# EAGLE board BPv3-PIC-prog-v1c (EAGLE 5.07)
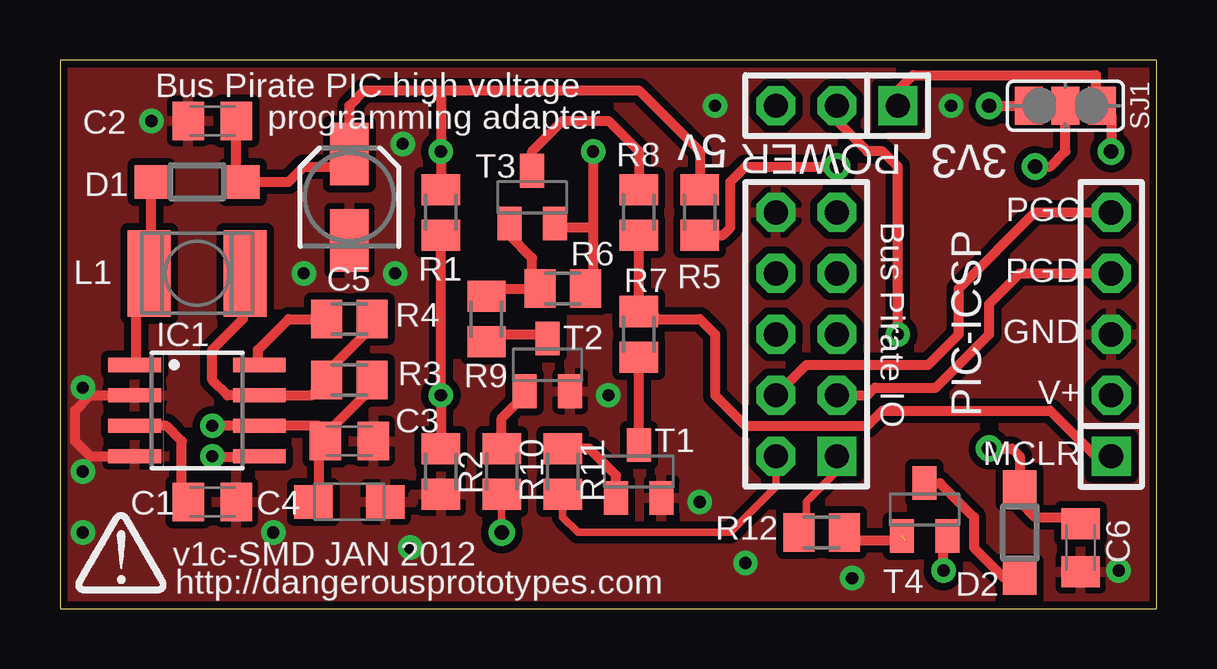
[diagram p0: board, top side]
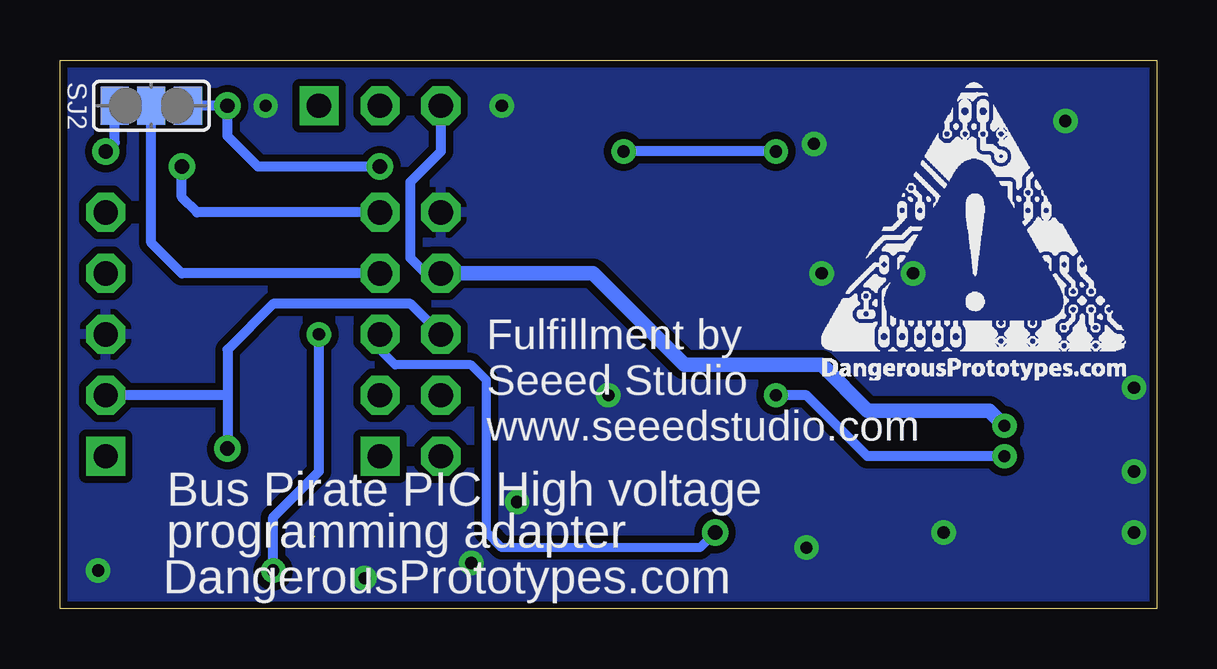
[diagram p1: board, bottom side, seen from below]

Size 45.72 x 22.86 mm. Coordinates in mm from the lower left corner, seen from the top.
Outline: 0,0 45.72,0 45.72,22.86 0,22.86 0,0
Copper layers (1*16): Top 0.035mm / dielectric 1.5mm / Bottom 0.035mm
Design rules "SparkFun": minimum track width 8mil, minimum drill 20mil, track to track 8mil, track to pad 8mil, pad to pad 8mil, via to via 8mil, smd to smd 8mil, copper to edge 10mil, drill to drill 8mil, minimum pad ring 12mil, minimum via ring 10mil, stop-mask expansion 4mil, vias tented up to drill 25mil, thermal gap 10mil

## Footprints (pad centres in the part's own frame; a part is rotated, then mirrored left to right if it is on the bottom)
C0805K = smd 1.3 x 1.6: 1 -1,0; 2 1,0
SMC_A = smd 1.6 x 1.4: + -1.5,0; - 1.5,0
SANYO-OSCON_SMD_A5 = smd 2.6 x 1.6: + 1.8,0; - -1.8,0
SOD123 = smd 1.4 x 1.4: A 1.9,0; C -1.9,0
SO08 = smd 0.6 x 2.2: 1 -1.905,-2.6; 2 -0.635,-2.6; 3 0.635,-2.6; 4 1.905,-2.6; 5 1.905,2.6; 6 0.635,2.6; 7 -0.635,2.6; 8 -1.905,2.6
2X05 = drill 1.016 square: 1 -5.08,-1.27 | drill 1.016 octagon: 2 -5.08,1.27; 3 -2.54,-1.27; 4 -2.54,1.27; 5 0,-1.27; 6 0,1.27; 7 2.54,-1.27; 8 2.54,1.27; 9 5.08,-1.27; 10 5.08,1.27
L4532P = smd 1.8 x 3.6: 1 -2,0; 2 2,0
1X05 = drill 1.016 square: 1 -5.08,0 | drill 1.016 octagon: 2 -2.54,0; 3 0,0; 4 2.54,0; 5 5.08,0
1X03 = drill 1.016 square: 1 -2.54,0 | drill 1.016 octagon: 2 0,0; 3 2.54,0
M0805 = smd 1.3 x 1.6: 1 -0.95,0; 2 0.95,0
SJ_2 = smd 1.168 x 1.6: 1 -1.524,0; 2 0,0; 3 1.524,0
SOT23-BEC = smd 1 x 1.4: B -0.95,-1.1; C 0,1.1; E 0.95,-1.1

## Placement (x,y rotation side)
C1  470pF  [C0805K]  6.35,4.45 0 top
C2  0.1uF/50V  [C0805K]  6.35,20.32 180 top
C3  0.1uF  [C0805K]  12.06,6.98 0 top
C4  10uF  [SMC_A]  12.06,4.45 0 top
C5  4.7uF/35V  [SANYO-OSCON_SMD_A5]  12.06,17.15 90 top
C6  0.1uF/50V  [C0805K]  42.55,2.54 270 top
D1  1N5819, 20V, 1A+  [SOD123]  5.72,17.78 180 top
D2  1N5819, 20V, 1A+  [SOD123]  40,3.18 270 top
IC1  MC34063AD  [SO08]  5.72,8.26 270 top
JP1  FEMALE!!  [2X05]  31.12,11.43 90 top
L1  680uH/0.12A  [L4532P]  5.72,13.97 0 top
PIC-ICSP  [1X05]  43.81,11.43 90 top
POWER  [1X03]  32.39,20.95 180 top
R1  20K  [M0805]  15.88,16.51 270 top
R2  2K2  [M0805]  15.88,5.71 270 top
R3  4R7  [M0805]  12.06,9.53 180 top
R4  180R  [M0805]  12.06,12.06 0 top
R5  39K  [M0805]  26.67,16.51 90 top
R6  100K  [M0805]  20.95,13.33 0 top
R7  100R  [M0805]  24.13,11.43 90 top
R8  10K  [M0805]  24.13,16.51 90 top
R9  10K  [M0805]  17.78,12.06 90 top
R10  10K  [M0805]  18.41,5.71 90 top
R11  10K  [M0805]  20.95,5.71 90 top
R12  10K  [M0805]  31.75,3.18 0 top
SJ1  [SJ_2]  41.91,20.95 0 top
SJ2  [SJ_2]  41.91,20.95 180 bottom
T1  NPN, 200mA+, 30+hfe  [SOT23-BEC]  24.13,5.71 0 top
T2  NPN, 200mA+, 30+hfe  [SOT23-BEC]  20.32,10.16 0 top
T3  PNP, 200mA+, 30hfe  [SOT23-BEC]  19.69,17.15 0 top
T4  PNP, 1A+, 40+ hef  [SOT23-BEC]  36.04,4.13 0 top
U$1  [DP-LOGO]  0.63,0.63 0 top
U$3  [DP_LOGO_ART_0.5X0.5]  13.97,9.53 0 bottom

## Library data of the parts
C1-C6 L1 R1-R12 = rcl
D1 D2 = diode
IC1 = v-reg-3
JP1 PIC-ICSP POWER = pinhead-2
SJ1 SJ2 = jumper
T1-T4 U$3 = dp_devices
U$1 = DP-logo

## Nets
3V3: POWER.1 SJ1.3 SJ2.3
3V3(V3)ADC(V2GO): JP1.9 SJ1.2
5V: C3.1 C4.+ IC1.6 JP1.8 POWER.3 R3.1
13V: C2.1 C5.+ D1.C R1.1 R5.2 R6.2 T3.E
ADC: R5.1 SJ1.1 SJ2.1
ADC(V3)3V3(V2GO): JP1.7 SJ2.2
GND: C1.2 C2.2 C3.2 C4.- C5.- C6.2 IC1.2 IC1.4 JP1.10 PIC-ICSP.3 R2.2 T1.E T2.E
MCLR: JP1.2 R11.1
MISO: JP1.1 R12.1
N$1: R12.2 T4.B
N$3: R7.1 T1.C
N$4: R8.2 T3.C
N$5: R9.1 T2.C
N$6: R6.1 R9.2 T3.B
N$7: R11.2 T1.B
N$8: R10.2 T2.B
N$9: IC1.8 R4.1
N$10: D2.A T4.C
N$11: IC1.7 L1.2 R3.2 R4.2
N$14: IC1.5 R1.2 R2.1
N$17: D1.A IC1.1 L1.1
N$19: C1.1 IC1.3
PGC: JP1.4 PIC-ICSP.5
PGD: JP1.3 PIC-ICSP.4
VDD_SWITCH: POWER.2 T4.E
VPP: PIC-ICSP.1 R7.2 R8.1
VPPEN: JP1.5 R10.1
VTARGET: C6.1 D2.C JP1.6 PIC-ICSP.2

## Tracks (layer width: path | path; a pad name or v marks a point on that pad's centre or on a via)
3V3  (via drill 0.6)
  Top 0.406: POWER.1 34.92,21.59 35.56,22.23 43.18,22.23 43.18,21.21 SJ2.3 43.81,20.57 v43.81,19.05
  Bottom 0.406: SJ2.3 43.43,19.43 v43.81,19.05
3V3(V3)ADC(V2GO)  (via drill 0.6)
  Top 0.305: SJ1.2 43.18,20.95
  Top 0.406: v40.64,18.41 41.28,18.41 41.91,19.05 SJ1.2
  Bottom 0.406: JP1.9 40,16.51 40.64,17.15 v40.64,18.41
5V  (via drill 0.51)
  Top 0.406: 10.8,6.98 C3.1 11.43,7.35 11.43,7.62 12.7,8.89 12.7,9.21 R3.1 13.34,9.21 | v6.35,7.62 IC1.6 10.8,7.62 10.8,6.98 | 10.8,6.98 10.8,4.68 C4.+ 10.74,4.45 10.69,4.39
  Bottom 0.406: POWER.3 29.84,19.05 31.12,17.78 31.12,14.6 30.48,13.97 JP1.8
  Bottom 0.61: JP1.8 23.49,13.97 19.69,10.16 13.97,10.16 12.06,8.26 6.98,8.26 v6.35,7.62
13V  (via drill 0.51)
  Top 0.406: C2.1 7.35,18.05 D1.C 9.52,17.78 10.16,18.41 12.06,18.41 C5.+ | C5.+ 12.22,19.1 | R1.1 v15.88,19.05 15.88,21.59 | R5.2 26.67,19.05 24.13,21.59 15.88,21.59 | 15.88,21.59 12.7,21.59 12.06,20.95 C5.+ | R6.2 22.23,13.33 22.23,15.87 | T3.E 20.78,16.05 20.95,15.87 22.23,15.87 | v22.23,19.05 22.23,15.87
  Bottom 0.406: v15.88,19.05 v22.23,19.05
ADC  (via drill 0.6)
  Top 0.406: R5.1 27.62,15.56 27.94,15.87 27.94,17.78 28.58,18.41 v32.39,18.41 | 40.64,20.7 SJ2.1 v38.73,20.95
  Bottom 0.406: SJ2.1 v38.73,20.95 38.73,19.69 37.47,18.41 v32.39,18.41
ADC(V3)3V3(V2GO)
  Bottom 0.305: SJ2.2 40,20.95
  Bottom 0.406: JP1.7 40.64,13.97 41.91,15.24 SJ2.2
GND  (via drill 0.51)
  Top 0.406: IC1.2 1.27,8.89 0.63,8.26 0.63,6.98 1.27,6.35 IC1.4
  other vias: 26.67,4.45 22.86,8.89 10.16,13.97 13.97,13.97 0.95,3.18 14.6,2.54 8.89,3.18 0.95,9.21 0.95,5.71 37.15,20.95 27.3,20.95 28.58,1.91 44.13,1.59 3.81,20.32 14.29,19.37 33.02,1.27
  pour Bottom (isolate 0.305): 0,22.86 0,0 45.72,0 45.72,22.86
  pour Top (isolate 0.305): 0,22.86 45.72,22.86 45.72,0 0,0
MCLR
  Top 0.305: JP1.2 29.84,5.08 27.94,3.18 21.59,3.18 20.95,3.81 R11.1
MISO
  Top 0.305: JP1.1 32.39,5.71 31.12,4.45 31.12,3.49 R12.1
N$1  (1 unrouted)
  Top 0.406: 35.25,2.85 35.24,2.86 33.02,2.86 R12.2
N$3
  Top 0.406: T1.C R7.1
N$4
  Top 0.406: R8.2 24.13,19.05 22.86,20.32 20.95,20.32 19.69,19.05 T3.C
N$5
  Top 0.406: T2.C 20.32,11.43 18.09,11.43 R9.1
N$6
  Top 0.406: 18.41,16.51 18.73,16.19 T3.B 18.73,15.56 19.69,14.6 19.69,13.65 R6.1 18.1,13.33 R9.2
N$7
  Top 0.406: R11.2 22.07,6.66 23.18,5.56 T1.B
N$8
  Top 0.406: R10.2 18.41,7.94 19.37,8.89 T2.B
N$9
  Top 0.406: R4.1 9.52,12.06 8.26,10.79 8.26,10.22 IC1.8
N$10
  Top 0.406: T4.C 36.68,5.23 38.1,3.81 38.1,2.54 39.37,1.27 D2.A
N$11
  Top 0.406: R4.2 12.7,11.75 12.7,11.43 11.12,9.85 R3.2 10.48,8.89 IC1.7 6.98,8.89 6.35,9.53 6.35,10.79 7.62,12.06 7.62,13.97 L1.2
N$14  (via drill 0.51)
  Top 0.406: IC1.5 8.29,6.32 6.33,6.32 v6.35,6.35 | R2.1 v15.88,8.89 R1.2
  Bottom 0.406: v6.35,6.35 12.06,6.35 14.6,8.89 v15.88,8.89
N$17
  Top 0.406: 3.72,17.68 D1.A 3.81,13.97 L1.1 3.12,13.37 3.17,13.31 3.17,10.16 IC1.1
N$19
  Top 0.406: IC1.3 4.45,7.62 5.08,6.98 5.08,4.08 C1.1
PGC
  Top 0.406: JP1.4 31.12,10.16 36.19,10.16 37.47,11.43 37.47,13.33 40.64,16.51 PIC-ICSP.5
PGD
  Top 0.406: PIC-ICSP.4 40,13.97 38.73,12.7 38.73,11.43 36.51,9.21 33.97,9.21 33.66,8.89 JP1.3
VDD_SWITCH  (via drill 0.51)
  Top 0.406: POWER.2 32.39,20.32 33.66,19.05 34.29,19.05 34.92,18.41 v34.92,11.43 | 36.99,1.74 v36.83,1.59 36.83,3.03 T4.E
  Bottom 0.406: v34.92,11.43 34.92,5.71 36.83,3.81 v36.83,1.59
VPP
  Top 0.305: R7.2 24.77,12.06
  Top 0.406: R8.1 R7.2 24.8,12.19 | PIC-ICSP.1 43.18,6.35 41.28,8.26 34.29,8.26 33.66,7.62 28.58,7.62 27.3,8.89 27.3,11.43 26.67,12.06 24.77,12.06
VPPEN  (via drill 0.6)
  Top 0.305: R10.1 v18.41,3.18
  Bottom 0.381: v18.41,3.18 19.05,2.54 27.3,2.54 27.94,3.18 27.94,9.53 28.58,10.16 31.75,10.16 32.39,10.79 JP1.5
VTARGET  (via drill 0.6)
  Top 0.406: C6.1 42.28,3.81 40.64,3.81 40,4.45 D2.C 40,6.35 39.69,6.67 v38.73,6.67
  Bottom 0.406: JP1.6 31.12,12.7 36.83,12.7 38.73,10.79 38.73,8.89 | 38.73,8.89 PIC-ICSP.2 | 38.73,8.89 v38.73,6.67

## Text on the board
tPlace: Bus Pirate PIC high voltage | programming adapter | PGC | Bus Pirate IO | PGD | GND | V+ | MCLR | v1c-SMD JAN 2012 | http://dangerousprototypes.com
tNames: 5v | 3v3
bNames: Fulfillment by | Seeed Studio | www.seeedstudio.com | Bus Pirate PIC High voltage | programming adapter | DangerousPrototypes.com